# EAGLE board wristwatch1 (EAGLE 6.5.0)
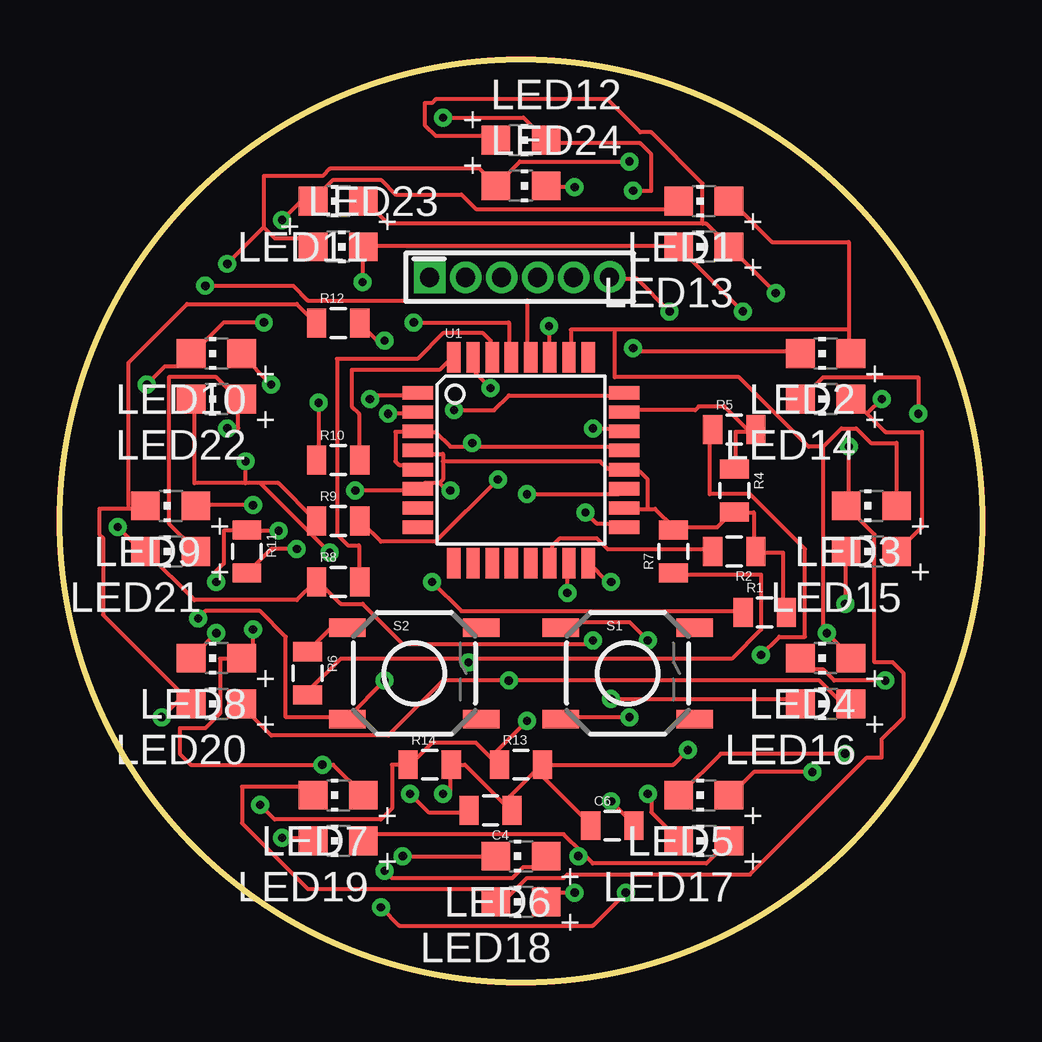
[diagram p0: board, top side]
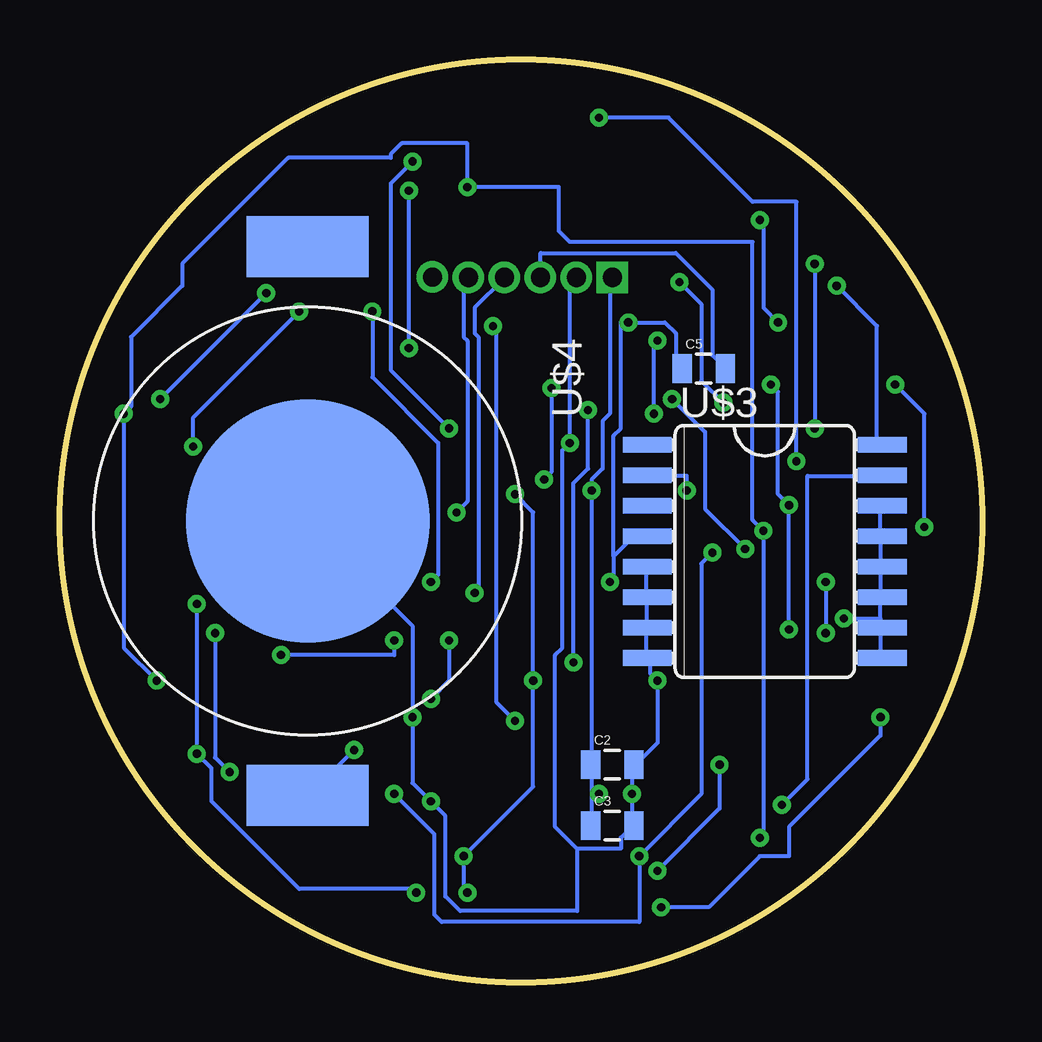
[diagram p1: board, bottom side, seen from below]

Size 38.44 x 38.44 mm. Coordinates in mm from the lower left corner, seen from the top.
Outline: circle at 19.22,19.22 radius 19.22
Copper layers (1*16): Top 0.035mm / dielectric 1.5mm / Bottom 0.035mm
Design rules "default *": minimum track width 6.5mil, minimum drill 13.5mil, track to track 8mil, track to pad 8mil, pad to pad 8mil, via to via 8mil, smd to smd 8mil, copper to edge 40mil, drill to drill 8mil, minimum pad ring 10mil, minimum via ring 8mil, stop-mask expansion 4mil, vias tented up to drill 0mil, thermal gap 10mil

## Footprints (pad centres in the part's own frame; a part is rotated, then mirrored left to right if it is on the bottom)
0805 = smd 0.8 x 1.2: 1 -0.9,0; 2 0.9,0
CHIP-LED0805 = smd 1.2 x 1.2: A 0,-1.05; C 0,1.05
SPARKFUN_0805 = smd 0.8 x 1.2: 1 -0.9,0; 2 0.9,0
TACTILE-SWITCH-SMD = smd 1.524 x 0.762: 1 -2.794,1.905; 2 2.794,1.905; 3 -2.794,-1.905; 4 2.794,-1.905
TQFP32-08 = smd 1.27 x 0.559: 1 -4.293,2.8; 2 -4.293,2; 3 -4.293,1.2; 4 -4.293,0.4; 5 -4.293,-0.4; 6 -4.293,-1.2; 7 -4.293,-2; 8 -4.293,-2.8; 17 4.293,-2.8; 18 4.293,-2; 19 4.293,-1.2; 20 4.293,-0.4; 21 4.293,0.4; 22 4.293,1.2; 23 4.293,2; 24 4.293,2.8 | smd 0.559 x 1.27: 9 -2.8,-4.293; 10 -2,-4.293; 11 -1.2,-4.293; 12 -0.4,-4.293; 13 0.4,-4.293; 14 1.2,-4.293; 15 2,-4.293; 16 2.8,-4.293; 25 2.8,4.293; 26 2,4.293; 27 1.2,4.293; 28 0.4,4.293; 29 -0.4,4.293; 30 -1.2,4.293; 31 -2,4.293; 32 -2.8,4.293
AVR_MINI_PROG = drill 0.8 pad 1.27 square: 1 0,0 | drill 0.8 pad 1.27: 2 1.5,0; 3 3,0; 4 4.5,0; 5 6,0; 6 7.5,0.01
SO16L = smd 0.66 x 2.032: 1 -4.445,-4.902; 2 -3.175,-4.902; 3 -1.905,-4.902; 4 -0.635,-4.902; 5 0.635,-4.902; 6 1.905,-4.902; 7 3.175,-4.902; 8 4.445,-4.902; 9 4.445,4.902; 10 3.175,4.902; 11 1.905,4.902; 12 0.635,4.902; 13 -0.635,4.902; 14 -1.905,4.902; 15 -3.175,4.902; 16 -4.445,4.902
CR2032-BAT-HLD = smd 10.16 x 10.16: NEG 0,0 | smd 2.54 x 5.08: POS1 11.43,0; POS2 -11.43,0

## Placement (x,y rotation side)
C2  .1uF  [0805]  15.41,9.06 0 bottom
C3  .1uF  [0805]  15.41,6.52 0 bottom
C4  .1uF  [0805]  17.95,7.15 180 top
C5  .1uF  [0805]  11.6,25.57 0 bottom
C6  .1uF  [0805]  23.03,6.52 0 top
LED1  [CHIP-LED0805]  26.84,32.55 90 top
LED2  [CHIP-LED0805]  31.92,26.2 90 top
LED3  [CHIP-LED0805]  33.82,19.85 90 top
LED4  [CHIP-LED0805]  31.92,13.5 90 top
LED5  [CHIP-LED0805]  26.84,7.79 90 top
LED6  [CHIP-LED0805]  19.22,5.25 90 top
LED7  [CHIP-LED0805]  11.6,7.79 90 top
LED8  [CHIP-LED0805]  6.52,13.5 90 top
LED9  [CHIP-LED0805]  4.61,19.85 90 top
LED10  [CHIP-LED0805]  6.52,26.2 90 top
LED11  [CHIP-LED0805]  11.6,32.55 90 top
LED12  [CHIP-LED0805]  19.22,35.09 270 top
LED13  [CHIP-LED0805]  26.84,30.65 90 top
LED14  [CHIP-LED0805]  31.92,24.3 90 top
LED15  [CHIP-LED0805]  33.82,17.95 90 top
LED16  [CHIP-LED0805]  31.92,11.6 90 top
LED17  [CHIP-LED0805]  26.84,5.88 90 top
LED18  [CHIP-LED0805]  19.22,3.34 90 top
LED19  [CHIP-LED0805]  11.6,5.88 90 top
LED20  [CHIP-LED0805]  6.52,11.6 90 top
LED21  [CHIP-LED0805]  4.61,17.95 90 top
LED22  [CHIP-LED0805]  6.52,24.3 90 top
LED23  [CHIP-LED0805]  11.6,30.65 270 top
LED24  [CHIP-LED0805]  19.22,33.19 270 top
R1  10k  [SPARKFUN_0805]  29.38,15.41 0 top
R2  10k  [SPARKFUN_0805]  28.11,17.95 180 top
R4  10k  [SPARKFUN_0805]  28.11,20.49 270 top
R5  100ohm  [SPARKFUN_0805]  28.11,23.03 0 top
R6  100ohm  [SPARKFUN_0805]  10.33,12.87 270 top
R7  10k  [SPARKFUN_0805]  25.57,17.95 90 top
R8  330  [SPARKFUN_0805]  11.6,16.68 0 top
R9  330  [SPARKFUN_0805]  11.6,19.22 0 top
R10  330  [SPARKFUN_0805]  11.6,21.76 0 top
R11  330  [SPARKFUN_0805]  7.79,17.95 270 top
R12  330  [SPARKFUN_0805]  11.6,27.47 0 top
R13  10k  [SPARKFUN_0805]  19.22,9.06 0 top
R14  10k  [SPARKFUN_0805]  15.41,9.06 0 top
S1  [TACTILE-SWITCH-SMD]  23.66,12.87 0 top
S2  [TACTILE-SWITCH-SMD]  14.77,12.87 0 top
U1  ATMEGA328P  [TQFP32-08]  19.22,21.76 0 top
U$1  AVR_MINI_PROGSMD  [AVR_MINI_PROG]  15.41,29.38 0 top
U$3  DS3231SN  [SO16L]  9.06,17.95 270 bottom
U$4  CR2032  [CR2032-BAT-HLD]  28.11,19.22 270 bottom

## Library data of the parts
C2-C6 = SparkFun
LED1-LED24 = adafruit
R1 R2 R4-R14 = DeadOn RTC - DS3234 Breakout-v11
S1 S2 = SparkFun-Electromechanical
U1 = SparkFun-DigitalIC; PROD_ID: IC-09069
U$1 = SparkFun-Connectors
U$3 U$4 = dale

## Nets
COL0: LED1.C LED10.C LED11.C LED16.C LED21.C R8.1
COL1: LED2.C LED6.C LED12.C LED17.C LED22.C R9.1
COL2: LED3.C LED7.C LED13.C LED18.C LED23.C R10.1
COL3: LED4.C LED8.C LED14.C LED19.C LED24.C R11.1
COL4: LED5.C LED9.C LED15.C LED20.C R12.1
CS_1: R2.2 U1.14
GND: C2.2 C3.2 C4.2 C6.2 S1.3 S2.3 U1.3 U1.5 U1.21 U$1.2 U$3.5 U$3.6 U$3.7 U$3.8 U$3.9 U$3.10 U$3.11 U$3.12 U$3.13 U$3.14 U$4.NEG
MISO: U1.16 U$1.6
MOSI: U1.15 U$1.4
N$1: C5.2 U$1.3
N$3: R4.1 R5.2 U1.23
N$4: R5.1 S1.1
N$5: R6.1 S2.1
N$6: R8.2 U1.30
N$7: R6.2 R7.1 U1.24
N$8: R9.2 U1.31
N$9: R10.2 U1.32
N$10: R11.2 U1.1
N$11: R12.2 U1.2
RESET: C5.1 R1.1 U1.29 U$3.4
ROW0: LED1.A LED2.A LED3.A LED4.A LED5.A U1.26
ROW1: LED6.A LED7.A LED8.A LED9.A LED10.A
ROW2: LED11.A LED12.A LED13.A LED14.A LED15.A
ROW3: LED16.A LED17.A LED18.A LED19.A LED20.A U1.19
ROW4: LED21.A LED22.A LED23.A LED24.A U1.22
SCK: U1.17 U$1.5
SCL: U1.28 U$3.16
SDA: R13.1 R14.1 U1.27 U$3.15
VCC: C2.1 C3.1 C4.1 C6.1 R1.2 R2.1 R4.2 R7.2 R13.2 R14.2 U1.4 U1.6 U1.18 U1.20 U$1.1 U$3.2 U$4.POS1

## Tracks (layer width: path | path; a pad name or v marks a point on that pad's centre or on a via)
COL0  (via drill 0.34)
  Top 0.165: v8.5,27.5 6.82,27.5 5.6,26.28 LED10.C 5.45,26.13 4.99,25.67 4.38,25.67 v3.62,24.91 | v9.26,31.77 10.02,32.53 10.48,32.53 LED11.C 10.63,32.68 11.4,33.44 13.38,33.44 13.99,32.83 16.73,32.83 17.34,32.22 25.42,32.22 25.72,32.53 LED1.C | v22.98,11.8 30.6,11.8 30.75,11.65 LED16.C | v22.22,14.24 22.06,14.09 14.29,14.09 12.61,15.76 11.7,15.76 10.79,16.68 R8.1 10.63,16.68 9.87,15.92 5.6,15.92 3.62,17.9 LED21.C 3.47,18.05 3.32,18.05 v2.4,18.96
  Bottom 0.165: v8.5,27.5 9.11,28.11 9.11,31.61 v9.26,31.77 | v22.98,11.8 22.22,12.56 v22.22,14.24 | v3.62,24.91 2.4,23.69 v2.4,18.96
COL1  (via drill 0.34)
  Top 0.165: v23.89,32.99 24.65,32.99 24.65,34.51 24.2,34.97 20.39,34.97 LED12.C 20.23,35.12 19.32,36.03 v15.97,36.03 | v23.89,26.43 24.04,26.28 30.75,26.28 LED2.C | 8.35,20.79 9.11,20.79 10.63,19.27 R9.1 | 8.35,20.79 7.74,20.79 | 7.74,20.79 5.6,20.79 5.6,24.3 LED22.C | v14.29,5.25 LED6.C | 8.35,20.79 v11.24,17.9 | v24.5,7.84 24.65,7.84 24.65,7.08 25.72,6.01 LED17.C | 7.74,20.79 v7.74,21.71
  Bottom 0.165: v23.89,26.43 v23.89,32.99 | v11.24,17.9 11.7,17.44 11.7,7.84 v14.29,5.25 14.29,2.51 22.52,2.51 22.83,2.81 22.83,6.16 v24.5,7.84 | v15.97,36.03 13.07,36.03 9.57,32.53 7.74,32.53 v7.74,21.71
COL2  (via drill 0.34)
  Top 0.165: v10.79,24.15 10.79,21.86 R10.1 | v12.61,29.18 12.61,30.55 LED23.C 12.77,30.7 25.72,30.7 LED13.C 25.87,30.55 v28.46,27.96 | LED7.C 10.48,7.84 10.18,8.14 7.59,8.14 7.59,6.62 10.33,3.88 17.64,3.88 18.1,3.42 LED18.C 18.25,3.42 18.56,3.42 19.47,4.33 21,4.33 21.15,4.49 28.77,4.49 33.65,9.36 34.26,9.36 34.26,10.13 35.17,11.04 35.17,12.87 34.71,13.33 33.95,13.33 33.95,18.66 32.88,19.73 LED3.C 32.88,19.88 v32.88,22.32
  Bottom 0.165: v10.79,24.15 11.7,25.06 11.7,28.26 v12.61,29.18 | v28.46,27.96 32.88,23.54 v32.88,22.32
COL3  (via drill 0.34)
  Top 0.165: v34.41,12.56 32.27,12.56 31.82,13.02 31.36,13.02 30.9,13.48 LED4.C | v35.78,23.69 35.78,25.21 31.82,25.21 30.9,24.3 LED14.C | v6.52,14.54 5.6,13.63 LED8.C | v6.52,16.68 6.52,17.14 6.82,17.44 6.82,18.81 7.74,18.81 R11.1 7.89,18.81 v9.11,18.81 | v9.26,6.01 10.48,6.01 LED19.C | v21.45,33.14 20.39,33.14 LED24.C
  Bottom 0.165: v34.41,12.56 35.78,13.94 v35.78,23.69 35.47,23.99 35.47,26.89 33.34,29.02 33.34,29.94 28.92,34.36 24.65,34.36 24.65,34.51 24.2,34.97 21.45,34.97 v21.45,33.14 17.64,33.14 17.64,31.31 17.19,30.85 9.57,30.85 9.57,19.27 v9.11,18.81 9.11,6.16 v9.26,6.01 | v6.52,16.68 v6.52,14.54
COL4  (via drill 0.34)
  Top 0.165: v32.73,9.52 27.55,9.52 25.87,7.84 LED5.C | v32.73,15.76 32.73,17.9 LED15.C | 5.15,11.95 1.79,15.31 1.79,18.51 1.64,18.66 1.64,19.73 2.86,19.73 | 5.15,11.95 5.45,11.65 LED20.C 5.15,11.95 | 2.86,19.73 3.47,19.73 LED9.C | 2.86,19.73 2.86,25.82 5.3,28.26 9.87,28.26 10.63,27.5 R12.1 | v23.59,3.72 22.22,2.35 14.14,2.35 v13.38,3.11 | 5.15,11.95 v4.23,11.04
  Bottom 0.165: v32.73,15.76 v32.73,9.52 32.12,8.91 32.12,7.53 28.46,3.88 23.59,3.88 v23.59,3.72 | v13.38,3.11 11.4,3.11 9.26,5.25 8.04,5.25 8.04,6.47 4.23,10.28 v4.23,11.04
CS_1
  Top 0.165: R2.2 27.09,18.05 22.83,18.05 22.37,18.51 20.84,18.51 20.54,18.2 20.54,17.59 U1.14
GND  (via drill 0.34)
  Top 0.165: v22.98,7.53 23.89,6.62 C6.2 | v23.74,11.04 21,11.04 S1.3 | U1.5 14.9,21.4 14.75,21.56 14.14,21.56 13.99,21.71 13.99,22.93 14.9,22.93 U1.3 15.05,22.93 15.66,22.93 16.27,22.32 17.19,22.32 | 17.19,22.32 23.28,22.32 23.43,22.16 U1.21 | 17.19,22.32 v17.19,22.47 | v14.6,7.84 15.36,7.08 17.03,7.08 C4.2 | v13.53,12.56 12,11.04 S2.3 11.85,11.04 9.41,11.04 9.41,14.39 8.35,15.46 6.06,15.46 v5.76,15.15
  Bottom 0.165: U$4.NEG 23.74,14.85 v23.74,11.04 23.74,8.3 v22.98,7.53 22.37,6.92 22.37,3.57 21.76,2.96 16.88,2.96 16.88,5.55 | U$1.2 17.03,29.33 17.19,29.18 v17.19,22.47 17.49,22.16 17.49,13.94 17.8,13.63 17.8,6.47 16.88,5.55 | U$3.9 4.23,13.63 4.23,14.7 U$3.10 4.23,14.85 4.23,15.15 | 4.23,15.15 4.23,15.92 U$3.11 4.23,16.07 4.23,17.29 U$3.12 4.23,17.44 4.23,18.51 U$3.13 4.23,18.66 4.23,19.73 U$3.14 | U$3.5 13.99,17.29 13.99,16.07 U$3.6 13.99,15.92 13.99,14.85 U$3.7 13.99,14.7 13.99,13.63 U$3.8 13.83,13.48 13.83,12.87 v13.53,12.56 13.53,9.97 14.44,9.06 C2.2 14.6,9.06 v14.6,7.84 14.6,6.62 C3.2 14.6,6.47 15.05,6.01 15.05,5.55 16.88,5.55 | v5.76,15.15 4.23,15.15
MISO  (via drill 0.34)
  Top 0.165: v22.98,16.68 22.83,16.68 22.06,17.44 U1.16 | v25.42,27.96 24.04,29.33 22.98,29.33 U$1.6
  Bottom 0.165: v22.98,16.68 22.67,16.98 22.67,22.47 25.42,25.21 v25.42,27.96
MOSI  (via drill 0.34)
  Top 0.165: v21.15,16.22 21.15,17.44 U1.15
  Bottom 0.165: v21.15,16.22 21,16.37 21,26.89 21.15,27.04 21.15,28.11 19.93,29.33 U$1.4
N$1
  Bottom 0.165: C5.2 10.79,25.67 11.24,26.13 11.24,28.87 12.77,30.39 18.41,30.39 18.41,29.48 U$1.3
N$3
  Top 0.165: 28.77,22.93 28.92,22.93 R5.2 28.77,22.93 | 28.77,22.93 28.16,22.93 28.16,21.4 R4.1 | 28.77,22.93 27.7,23.99 26.64,23.99 26.48,23.84 23.59,23.84 U1.23
N$4  (via drill 0.34)
  Top 0.165: v29.23,13.63 29.99,14.39 31.05,14.39 31.05,18.05 28.77,20.34 27.09,20.34 27.09,22.93 R5.1 | v24.5,14.24 23.74,15 21.15,15 21,14.85 S1.1
  Bottom 0.165: v29.23,13.63 24.5,13.63 v24.5,14.24
N$5
  Top 0.165: R6.1 10.33,13.78 11.24,14.7 11.85,14.7 S2.1
N$6
  Top 0.165: R8.2 12.46,16.68 12.46,18.2 12,18.2 11.55,18.66 11.55,25.97 14.9,25.97 15.97,27.04 17.64,27.04 17.95,26.74 17.95,26.13 U1.30
N$7  (via drill 0.34)
  Top 0.165: 17.03,13.48 28.01,13.48 29.23,14.7 29.23,16.98 25.57,16.98 R7.1 | 17.03,13.48 11.7,13.48 10.33,12.11 R6.2 | v16.42,23.84 18.1,23.84 18.71,24.45 23.43,24.45 U1.24 | 17.03,13.48 v17.03,13.33
  Bottom 0.165: v16.42,23.84 16.42,21.4 17.03,20.79 v17.03,13.33
N$8  (via drill 0.34)
  Top 0.165: v18.25,20.95 15.66,18.35 13.38,18.35 12.61,19.12 R9.2 | v17.95,24.76 17.34,25.37 17.34,25.97 U1.31
  Bottom 0.165: v18.25,20.95 17.95,21.25 v17.95,24.76
N$9
  Top 0.165: R10.2 12.46,21.86 12.46,23.69 12.16,23.99 12.16,25.52 15.81,25.52 16.27,25.97 U1.32
N$10  (via drill 0.34)
  Top 0.165: v9.87,18.05 8.8,18.05 7.89,17.14 R11.2 | v12.92,24.3 13.07,24.45 14.9,24.45 U1.1
  Bottom 0.165: v9.87,18.05 11.55,19.73 11.55,22.93 v12.92,24.3
N$11  (via drill 0.34)
  Top 0.165: v13.53,26.74 13.22,26.74 12.61,27.35 R12.2 | v13.68,23.69 14.9,23.69 U1.2
  Bottom 0.165: v13.53,26.74 13.68,26.58 v13.68,23.69
RESET  (via drill 0.34)
  Top 0.165: v15.51,16.68 16.73,15.46 28.46,15.46 R1.1 | v14.75,27.5 18.71,27.5 18.71,26.13 U1.29
  Bottom 0.165: v15.51,16.68 15.36,16.83 15.36,17.75 | 15.36,17.75 14.6,18.51 13.99,18.51 U$3.4 | 15.36,17.75 15.36,22.77 15.05,23.08 15.05,27.5 v14.75,27.5 13.22,27.5 12.77,27.04 12.77,25.82 12.61,25.67 C5.1
ROW0  (via drill 0.34)
  Top 0.165: 32.88,27.19 32.88,30.85 29.68,30.85 28.01,32.53 LED1.A | 32.88,27.19 32.88,26.28 LED2.A | 32.88,27.19 23.13,27.19 | 23.13,27.19 21.3,27.19 21.3,26.13 U1.26 | v31.36,8.75 28.92,8.75 28.01,7.84 LED5.A | LED4.A 32.88,13.63 v31.97,14.54 31.82,14.54 31.82,22.32 | 31.82,22.32 32.58,23.08 33.19,23.08 33.8,22.47 34.86,22.47 34.86,19.88 LED3.A | 23.13,27.19 23.13,25.21 28.31,25.21 31.21,22.32 31.82,22.32
  Bottom 0.165: v31.36,8.75 31.97,9.36 v31.97,14.54
ROW1  (via drill 0.34)
  Top 0.165: v8.04,19.88 5.76,19.88 LED9.A | v8.04,14.7 8.04,13.63 7.59,13.63 LED8.A 7.43,13.48 6.67,13.48 6.67,11.19 6.06,10.58 4.99,10.58 4.99,9.52 5.45,9.06 v10.94,9.06 11.4,9.06 12.61,7.84 LED7.A | v13.53,4.64 13.83,4.33 18.86,4.33 19.32,4.79 19.78,4.79 20.23,5.25 LED6.A | v8.8,24.91 7.59,26.13 LED10.A
  Bottom 0.165: v8.04,14.7 v8.04,19.88 8.5,20.34 8.5,24.6 v8.8,24.91 | v13.53,4.64 10.94,7.23 v10.94,9.06
ROW2  (via drill 0.34)
  Top 0.165: 33.65,23.69 33.04,24.3 LED14.A | 33.65,23.69 34.41,22.93 35.93,22.93 35.93,18.96 35.02,18.05 LED15.A | 26.79,31.61 26.94,31.61 27.85,30.7 LED13.A 28.01,30.55 v29.84,28.72 | 26.79,31.61 13.68,31.61 12.77,32.53 LED11.A | 26.79,31.61 26.79,33.29 24.65,35.42 24.2,35.42 22.83,36.8 15.66,36.8 15.51,36.64 15.21,36.64 15.21,35.73 15.66,35.27 17.95,35.27 18.1,35.12 LED12.A | v34.26,24.3 33.65,23.69
  Bottom 0.165: v29.84,28.72 v34.26,24.3
ROW3  (via drill 0.34)
  Top 0.165: LED20.A 7.59,11.5 8.8,10.28 13.68,10.28 15.97,12.56 v18.71,12.56 31.66,12.56 32.58,11.65 32.88,11.65 LED16.A | 21.76,5.4 22.22,4.94 26.94,4.94 27.85,5.86 LED17.A | 21.76,5.4 21,6.16 12.92,6.16 12.77,6.01 LED19.A | v21.45,3.72 20.69,3.72 20.39,3.42 LED18.A | 21.76,5.4 v21.61,5.25 | v19.47,20.34 23.28,20.34 23.43,20.49 U1.19
  Bottom 0.165: v21.45,3.72 21.61,3.88 v21.61,5.25 18.71,8.14 v18.71,12.56 18.71,19.57 v19.47,20.34
ROW4  (via drill 0.34)
  Top 0.165: 7.43,24.3 6.52,25.21 4.54,25.21 4.54,19.12 5.6,18.05 LED21.A | 8.5,31.46 8.96,31 10.18,31 10.48,30.7 LED23.A | 8.5,31.46 8.5,33.59 10.94,33.59 11.24,33.9 17.49,33.9 18.1,33.29 LED24.A 18.25,33.29 19.17,34.2 v23.74,34.2 | v22.22,23.08 23.43,23.08 U1.22 | 7.43,24.3 7.43,23.08 v6.98,23.08 | 8.5,31.46 v6.98,29.94 | 7.43,24.3 LED22.A
  Bottom 0.165: v22.22,23.08 24.65,25.52 24.65,33.29 v23.74,34.2 | v6.98,29.94 v6.98,23.08
SCK  (via drill 0.34)
  Top 0.165: v21.91,19.57 22.37,19.12 23.28,19.12 23.43,18.96 U1.17
  Bottom 0.165: v21.91,19.57 21.45,20.03 21.45,26.74 21.61,26.89 21.61,29.18 21.45,29.33 U$1.5
SCL  (via drill 0.34)
  Top 0.165: v6.06,29.02 9.72,29.02 10.33,28.41 19.47,28.41 19.47,26.13 U1.28
  Bottom 0.165: v6.06,29.02 4.38,27.35 4.38,22.62 U$3.16
SDA  (via drill 0.34)
  Top 0.165: 17.95,9.36 18.25,9.06 R13.1 17.95,9.36 | 17.95,9.36 17.34,9.97 15.51,9.97 14.6,9.06 R14.1 13.83,9.06 13.83,7.23 13.38,6.77 8.96,6.77 v8.35,7.38 | v20.39,27.35 20.39,26.13 U1.27 | 17.95,9.36 v19.47,10.89
  Bottom 0.165: v20.39,27.35 20.23,27.19 20.23,11.65 v19.47,10.89 | v8.35,7.38 7.28,8.45 7.28,21.1 4.23,21.1 U$3.15
VCC  (via drill 0.34)
  Top 0.165: R1.2 30.14,15.46 30.14,17.9 29.07,17.9 R2.1 28.92,18.05 28.92,19.57 28.16,19.57 R4.2 28.01,19.57 27.4,18.96 25.57,18.96 | 15.81,20.79 15.21,20.79 15.05,20.64 U1.6 14.9,20.49 v12.31,20.49 | 15.81,20.79 15.97,20.95 15.97,21.71 | 15.97,21.71 15.97,22.01 15.05,22.01 U1.4 | 25.57,18.96 24.81,19.73 24.5,19.73 | 24.5,19.73 23.59,19.73 U1.18 | 24.5,19.73 24.5,20.95 24.2,21.25 23.59,21.25 U1.20 23.43,21.4 22.83,21.4 22.52,21.71 15.97,21.71 | 25.57,18.96 R7.2 | 18.41,7.53 16.88,9.06 R14.2 16.27,9.06 16.27,7.84 v15.97,7.84 | 18.41,7.53 18.71,7.23 C4.1 | 19.78,8.75 18.56,7.53 18.41,7.53 | 19.78,8.75 20.08,9.06 R13.2 | 19.78,8.75 19.93,8.75 22.06,6.62 C6.1 | 19.78,8.75 R13.2 | v26.18,9.67 25.57,9.06 R13.2 | 15.81,20.79 16.12,20.49 v16.27,20.49
  Bottom 0.165: v12.31,20.49 12.31,21.1 13.83,21.1 U$3.2 | 16.27,9.06 16.27,7.84 | 16.27,7.84 16.27,6.62 C3.1 | 16.27,9.06 v16.27,20.49 16.27,20.95 15.81,21.4 15.81,23.38 15.51,23.69 15.51,29.33 U$1.1 | 16.27,9.06 R14.2 | 16.27,7.84 v15.97,7.84 | v26.18,9.67 28.01,7.84 U$4.POS1